# Altium PCB 3x2.PcbDoc
Units mm, origin at the board's own origin, x right, y up, seen from the top; angles counter-clockwise.
Board outline 55.01 x 42.15 mm, 2 copper layers (Top Layer, Bottom Layer); 8 components, 8 nets, 70 pads, 0 vias.
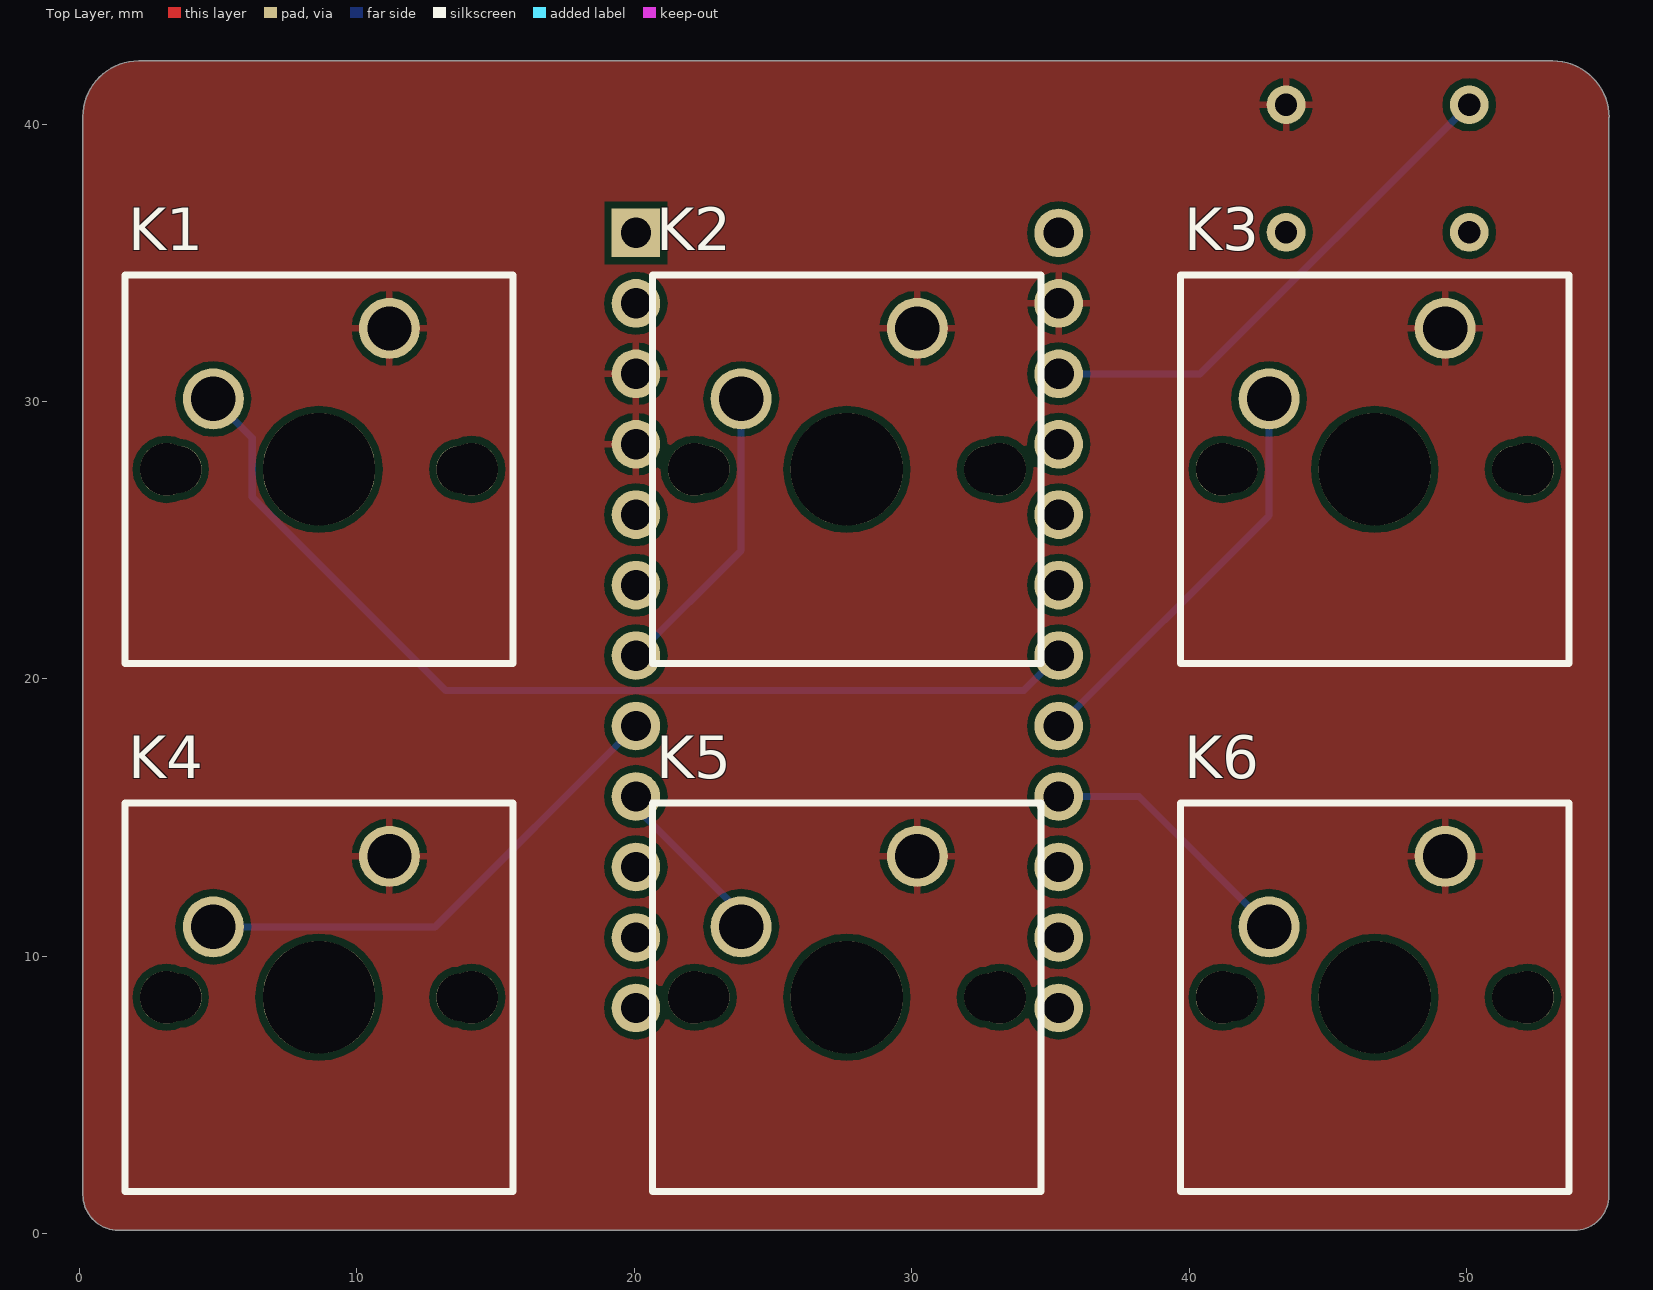
[diagram p0: Top Layer view]
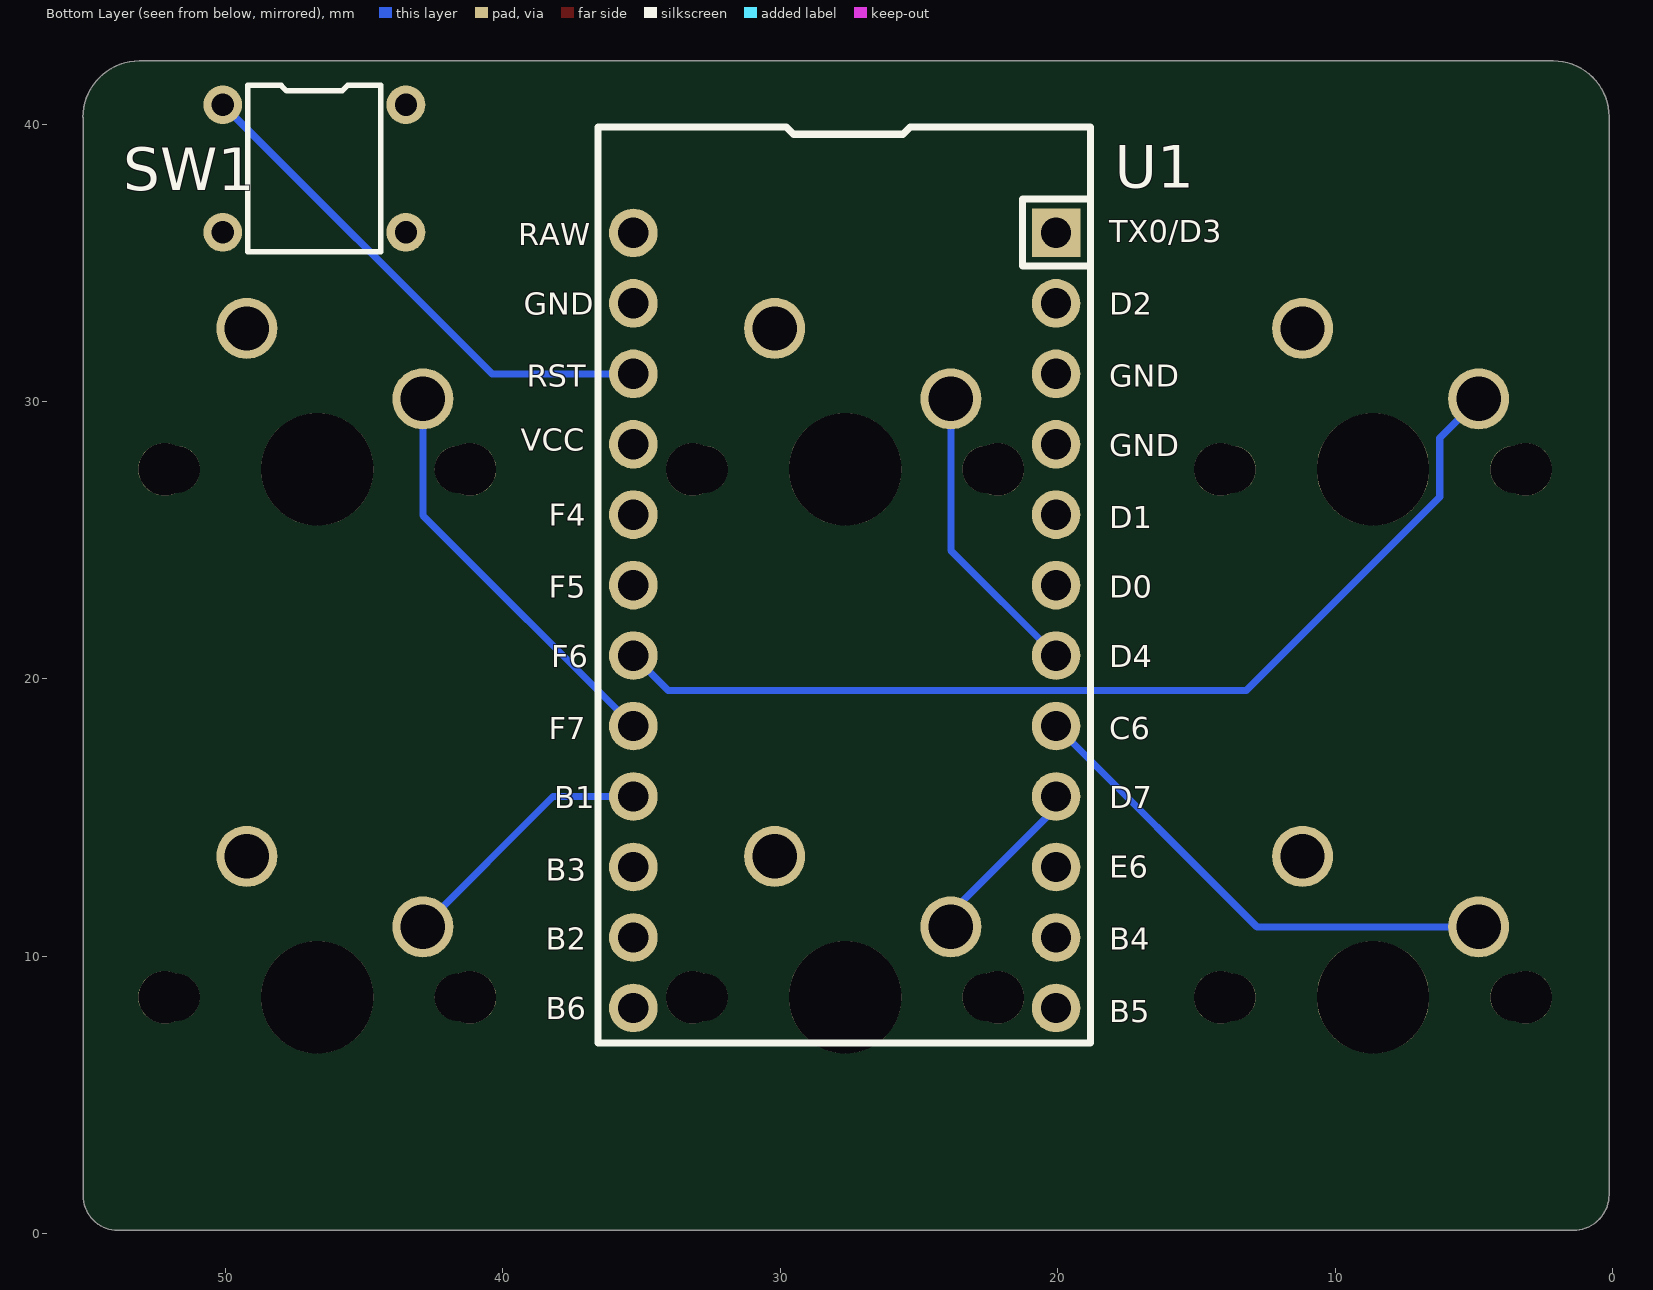
[diagram p1: Bottom Layer view, seen from below]

## Layer stack, top to bottom
Top Solder: solder mask 0.0102, Solder Resist, Dk 3.5
Top Layer: signal copper 0.0356
Dielectric 1: dielectric 0.32, FR-4, Dk 4.8
Bottom Layer: signal copper 0.0356
Bottom Solder: solder mask 0.0102, Solder Resist, Dk 3.5

## Board outline
1.4,0.127 cw(c1.4,1.4) 0.127,1.4 0.127,40.271 cw(c2.133,40.271) 2.133,42.277 53.106,42.277 cw(c53.106,40.243) 55.14,40.243 55.131,40.243 55.131,1.368 55.128,1.368 cw(c53.886,1.368) 53.886,0.125 53.885,0.125

## Design rules (kind name [scope] priority, off if disabled: settings)
Clearance [All] p1: gap=0.254 ignorepadtopadclearanceinfootprint=FALSE except(0: Arc-Hole Track-Hole SMDPad-Hole THPad-Hole Via-Hole Fill-Hole Poly-Hole Region-Hole Text-Hole)
PolygonConnect [All] p1: connectstyle=Relief reliefconductorwidth=0.254 reliefentries=4 polygonreliefangle="90 Angle" airgapwidth=0.254
RoutingVias [All] p1: holewidth=0.711 width=1.27 viastyle="Through Hole" minholewidth=0.711 minwidth=1.27 maxholewidth=0.711 maxwidth=1.27
SolderMaskExpansion [All] p1: expansion=0.102 istentingtop=FALSE
Width [All] p1: maxlimit=0.254 minlimit=0.254 preferedwidth=0.254
30 further rules are at their usual default settings.

## Components (designator, comment, footprint, x,y, rotation, side; value= is the part's Value field where it differs from the comment)
K1 "KEYSW-canadian_parts" Socket 1.585,20.555 r0 top
K2 "KEYSW-canadian_parts" Socket 20.615,20.555 r0 top
K3 "KEYSW-canadian_parts" Socket 39.645,20.555 r0 top
K4 "KEYSW-canadian_parts" Socket 1.585,1.525 r0 top
K5 "KEYSW-canadian_parts" Socket 20.615,1.525 r0 top
K6 "KEYSW-canadian_parts" Socket 39.645,1.525 r0 top
SW1 "SW_Push" RESET 48.6,35 r90 bottom
U1 "ProMicro-keebio" PRO-MICRO 35.3,36.08 r180 bottom

## Footprints (in the part's own frame and the unit in brackets; to place one, negate y for a bottom-side part, rotate by r counter-clockwise, add the part's x,y. Pads: shape width x height; smd on the part's side, far side on the other; paste and mask are expansions set on the pad)
PRO-MICRO [mm]
  rect 1.753x1.753 hole 1.092: 1(15.24,0)
  round 1.753 hole 1.092: 2(15.24,-2.54) 3(15.24,-5.08) 4(15.24,-7.62) 5(15.24,-10.16) 6(15.24,-12.7) 7(15.24,-15.24) 8(15.24,-17.78) 9(15.24,-20.32) 10(15.24,-22.86) 11(15.24,-25.4) 12(15.24,-27.94) 13(0,-27.94) 14(0,-25.4) 15(0,-22.86) 16(0,-20.32) 17(0,-17.78) 18(0,-15.24) 19(0,-12.7) 20(0,-10.16) 21(0,-7.62) 22(0,-5.08) 23(0,-2.54) 24(0,0)
  silkscreen extent -1.27,-29.21 16.48,3.81
RESET [mm]
  round 1.4 hole 0.8: 1(5.7,1.5) 2(5.7,-5.1) 3(1.1,1.5) 4(1.1,-5.1)
  silkscreen extent 0.4,-4.2 6.4,0.6
Socket [mm]
  round 2.2 hole 1.6: 1(3.24,9.54) 2(9.59,12.08)
  round 1.9 hole 1.9: 3(1.55,7) 3(12.55,7)
  round 1.7 hole 1.7: 3(1.97,7) 3(12.13,7)
  round 4.05 hole 4.05: 3(7.05,7)
  silkscreen extent 0.05,0 14.05,14

## Nets (pads, with @x,y where several pads share a name; then routed paths per layer and width w, separated by ;. In a path a pad name is that pad's centre, name@x,y a point inside that pad or via, vN(x,y) a via of type N, cw(c..) or ccw(c..) an arc to the next point about the centre after c; other vN are vias at no path point)
B1: K6.1 U1.16 | length 9.5
  Bottom Layer w0.254: U1.16 38.19,15.76 K6.1
C6: K4.1 U1.8 | length 18.2
  Bottom Layer w0.254: K4.1 12.825,11.065 U1.8
D4: K2.1 U1.7 | length 10.8
  Bottom Layer w0.254: U1.7 23.855,24.635 K2.1
D7: K5.1 U1.9 | length 6.3
  Bottom Layer w0.254: U1.9 20.06,15.354 23.855,11.559 K5.1
F6: K1.1 U1.18 | length 36.6
  Bottom Layer w0.254: K1.1 6.229,28.691 6.229,26.558 13.205,19.582 34.042,19.582 U1.18
F7: K3.1 U1.17 | length 14.9
  Bottom Layer w0.254: U1.17 42.885,25.885 K3.1
GND: K1.2 K2.2 K3.2 K4.2 K5.2 K6.2 SW1.2 U1.3 U1.4 U1.23
NetSW1_1: SW1.1 U1.22 | length 18.8
  Bottom Layer w0.254: U1.22 40.4,31 SW1.1
pads on no net: K1.3 K2.3 K3.3 K4.3 K5.3 K6.3 SW1.3 SW1.4 U1.1 U1.2 U1.5 U1.6 U1.10 U1.11 U1.12 U1.13 U1.14 U1.15 U1.19 U1.20 U1.21 U1.24

## Polygon pours and split planes (outlines as drawn)
GND on Top Layer "GND_L01_P013" (solid, pour order 13): 0.125,40.275 cw(c2.125,40.275) 2.125,42.275 53.1,42.275 cw(c53.1,40.25) 55.125,40.25 55.125,1.375 cw(c53.875,1.375) 53.875,0.125 1.4,0.125 cw(c1.4,1.4) 0.125,1.4
no net on Top Layer "NONET_L01_P012" (solid, pour order 12): 50.5,66.5
no net on Top Layer "NONET_L01_P007" (solid, pour order 7): 16.5,69.5
no net on Bottom Layer "NONET_L02_P014" (solid, pour order 14): 39.175,18.1

## Other copper
Top Layer:
  region: 146.878,207.896

## Silkscreen, mask and mechanical layers (free items; w line width, h text height)
Mechanical 1:
  lines w0.254: 55.128,1.368 cw(c53.886,1.368) 53.886,0.125 1.4,0.127 cw(c1.4,1.4) 0.127,1.4 0.127,40.271 cw(c2.133,40.271) 2.133,42.277 53.106,42.277 cw(c53.106,40.243) 55.14,40.243 ; 55.131,1.368 55.131,40.243

## Text inside footprints (layer, text, board x,y; h text height)
U1: Bottom Overlay "B5" at 18.15,7.63 h0.8; Bottom Overlay "B4" at 18.15,10.23 h0.8; Bottom Overlay "E6" at 18.15,12.83 h0.8; Bottom Overlay "TX0/D3" at 18.15,35.744 h0.8; Bottom Overlay "D7" at 18.15,15.33 h0.8; Bottom Overlay "C6" at 18.15,17.83 h0.8; Bottom Overlay "D4" at 18.15,20.43 h0.8; Bottom Overlay "D0" at 18.15,22.93 h0.8; Bottom Overlay "D1" at 18.15,25.43 h0.8; Bottom Overlay "GND" at 18.15,28.03 h0.8; Bottom Overlay "D2" at 18.15,33.13 h0.8; Bottom Overlay "B6" at 38.45,7.73 h0.8; Bottom Overlay "B2" at 38.45,10.23 h0.8; Bottom Overlay "B3" at 38.45,12.73 h0.8; Bottom Overlay "B1" at 38.15,15.33 h0.8; Bottom Overlay "F7" at 38.35,17.83 h0.8; Bottom Overlay "F5" at 38.35,22.93 h0.8; Bottom Overlay "F4" at 38.35,25.53 h0.8; Bottom Overlay "VCC" at 39.35,28.23 h0.8; Bottom Overlay "RST" at 39.15,30.53 h0.8; Bottom Overlay "GND" at 39.25,33.13 h0.8; Bottom Overlay "RAW" at 39.45,35.63 h0.8; Bottom Overlay "GND" at 18.15,30.53 h0.8; Bottom Overlay "F6" at 38.25,20.43 h0.8